# EAGLE board EasyBMS (EAGLE 9.6.2)
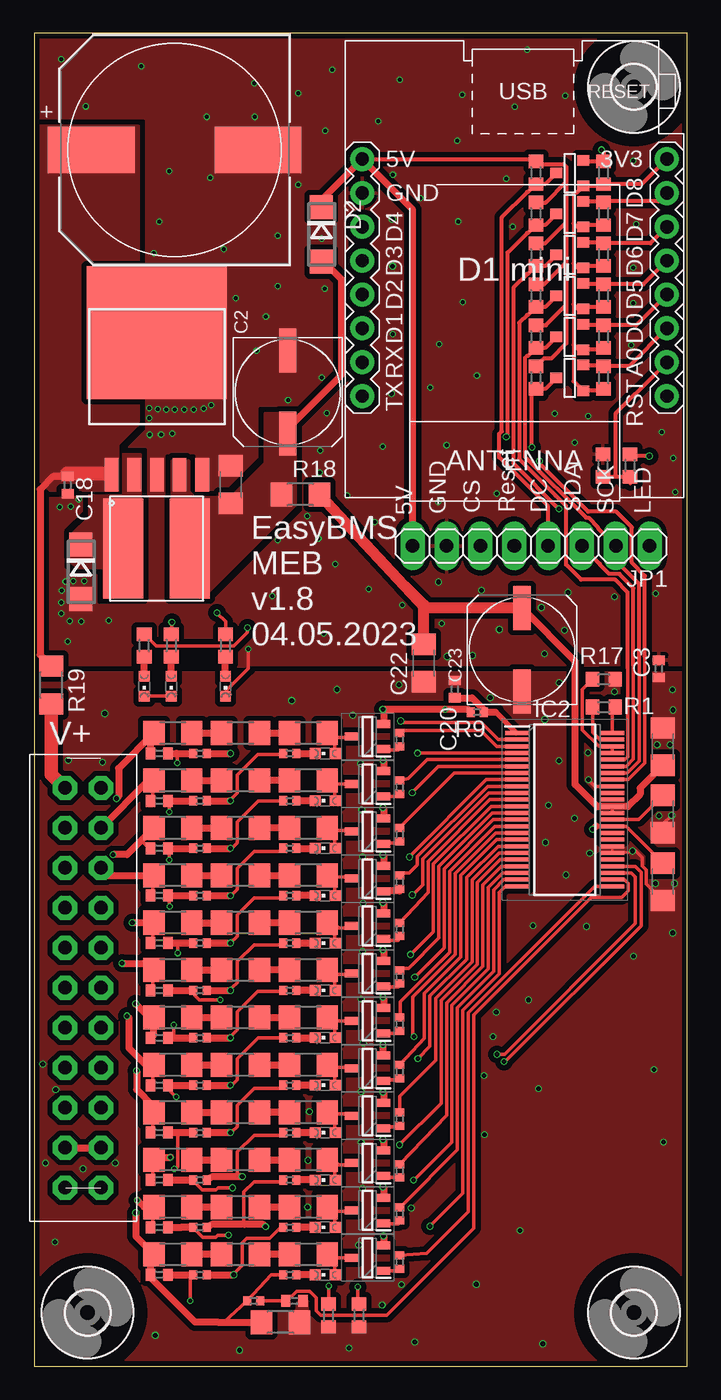
[diagram p0: board, top side]
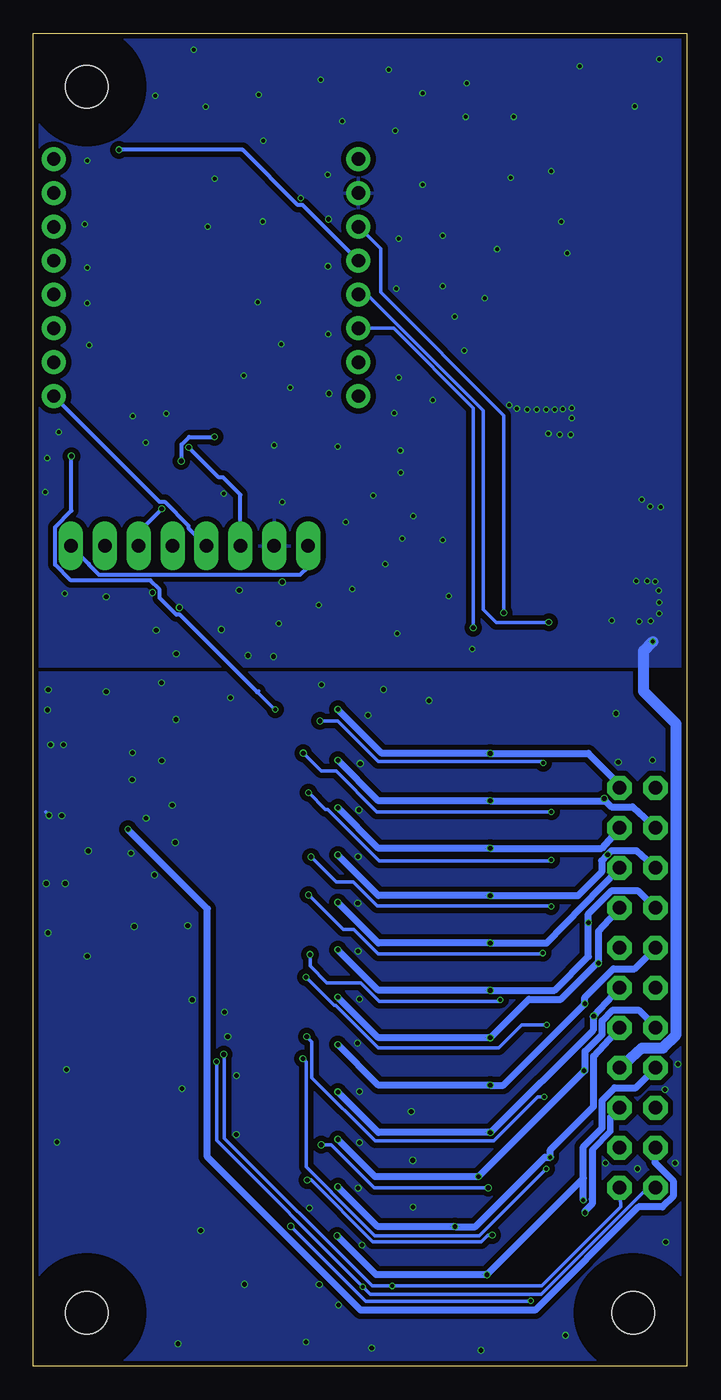
[diagram p1: board, bottom side, seen from below]

Size 49 x 100 mm. Coordinates in mm from the lower left corner, seen from the top.
Outline: 0,100 0,0 49,0 49,100 0,100
Copper layers (1*16): Top 0.035mm / dielectric 1.6mm / Bottom 0.035mm
Design rules "jlcpcb-2layers *": minimum track width 5mil, minimum drill 0.3mm, track to track 5mil, track to pad 5mil, pad to pad 5mil, via to via 5mil, smd to smd 5mil, copper to edge 0.2mm, drill to drill 6mil, minimum pad ring 10mil, minimum via ring 3mil, stop-mask expansion 4mil, vias tented up to drill 20mil, thermal gap 10mil

## Footprints (pad centres in the part's own frame; a part is rotated, then mirrored left to right if it is on the bottom)
C1206 = smd 1.6 x 1.8: 1 -1.4,0; 2 1.4,0
UD-8X10_NICHICON = smd 3.3 x 1.3: + 3.125,0; - -3.125,0
C0402 = smd 0.7 x 0.9: 1 -0.65,0; 2 0.65,0
WCAP-ASLI_16X17(DXL) = smd 6.5 x 3.5: 1 6.25,0; 2 -6.25,0
DO214AC = smd 1.8 x 1.7: A 2.05,0; C -2.05,0
3,2 = hole 3.2: 0,0
KTT0005B = smd 2.5 x 1.02: 1 6.111,-3.4; 2 6.111,-1.7; 3 6.111,0; 4 6.111,1.7; 5 6.111,3.4 | smd 10 x 10.5: 6 -4.564,0
SOP50P780X200-48N = smd 1.8 x 0.3: 1 -3.55,5.75; 2 -3.55,5.25; 3 -3.55,4.75; 4 -3.55,4.25; 5 -3.55,3.75; 6 -3.55,3.25; 7 -3.55,2.75; 8 -3.55,2.25; 9 -3.55,1.75; 10 -3.55,1.25; 11 -3.55,0.75; 12 -3.55,0.25; 13 -3.55,-0.25; 14 -3.55,-0.75; 15 -3.55,-1.25; 16 -3.55,-1.75; 17 -3.55,-2.25; 18 -3.55,-2.75; 19 -3.55,-3.25; 20 -3.55,-3.75; 21 -3.55,-4.25; 22 -3.55,-4.75; 23 -3.55,-5.25; 24 -3.55,-5.75; 25 3.55,-5.75; 26 3.55,-5.25; 27 3.55,-4.75; 28 3.55,-4.25; 29 3.55,-3.75; 30 3.55,-3.25; 31 3.55,-2.75; 32 3.55,-2.25; 33 3.55,-1.75; 34 3.55,-1.25; 35 3.55,-0.75; 36 3.55,-0.25; 37 3.55,0.25; 38 3.55,0.75; 39 3.55,1.25; 40 3.55,1.75; 41 3.55,2.25; 42 3.55,2.75; 43 3.55,3.25; 44 3.55,3.75; 45 3.55,4.25; 46 3.55,4.75; 47 3.55,5.25; 48 3.55,5.75
1X08 = drill 1.016 long: 1 -8.89,0; 2 -6.35,0; 3 -3.81,0; 4 -1.27,0; 5 1.27,0; 6 3.81,0; 7 6.35,0; 8 8.89,0
2X11_MEB12S = drill 1.016 octagon: 1_TOTAL+ 15,-1.35; 2_TOTAL+2 15,1.35; 3_C10+ 12,-1.35; 4_C11+ 12,1.35; 5_C8+ 9,-1.35; 6_C9+ 9,1.35; 7_C6+ 6,-1.35; 8_C7+ 6,1.35; 9 3,-1.35; 10_C5+ 3,1.35; 11_C4+ 0,-1.35; 12 0,1.35; 13_C2+ -3,-1.35; 14_C3+ -3,1.35; 15_TOTAL- -6,-1.35; 16_C1+ -6,1.35; 17_TOTAL- -9,-1.35; 18 -9,1.35; 19_THERMO1_IN -12,-1.35; 20_THERMO2_IN -12,1.35; 21_THERMO1_OUT -15,-1.35; 22_THERMO2_OUT -15,1.35
CY75-100UH = smd 3 x 7.5: P$1 -2.5,0; P$2 2.5,0
CHIPLED_0603 = smd 0.8 x 0.8: A 0,-0.75; C 0,0.75
SOT96P237X111-3N = smd 1 x 0.6: 1 -1.2,0.955; 2 -1.2,-0.955; 3 1.2,0
R0603 = smd 1 x 1.1: 1 -0.85,0; 2 0.85,0
R0402 = smd 0.6 x 0.7: 1 -0.5,0; 2 0.5,0
R1206 = smd 1.6 x 1.803: 1 -1.422,0; 2 1.422,0
SOT-23 = smd 0.787 x 0.889: 1 0.025,-1.016; 2 -0.94,1.016; 3 0.991,1.016
WEMOS-D1-MINI = drill 1: JP1.1 -11.43,9.525; JP1.2 -11.43,6.985; JP1.3 -11.43,4.445; JP1.4 -11.43,1.905; JP1.5 -11.43,-0.635; JP1.6 -11.43,-3.175; JP1.7 -11.43,-5.715; JP1.8 -11.43,-8.255; JP2.1 11.43,9.525; JP2.2 11.43,6.985; JP2.3 11.43,4.445; JP2.4 11.43,1.905; JP2.5 11.43,-0.635; JP2.6 11.43,-3.175; JP2.7 11.43,-5.715; JP2.8 11.43,-8.255

## Placement (x,y rotation side)
C1  1uF  [C1206]  47.17,41.43 270 top
C2  C249880  [UD-8X10_NICHICON]  19.02,73.08 270 top
C3  100n  [C0402]  46.86,52.32 90 top
C4  1uF  [C1206]  47.17,36.35 270 top
C5  10nF  [C0402]  19.53,4.9 0 top
C6  10nF  [C0402]  9.4,6.86 180 top
C7  10nF  [C0402]  9.4,10.41 180 top
C8  10nF  [C0402]  9.4,17.53 180 top
C9  10nF  [C0402]  9.4,13.97 180 top
C10  10nF  [C0402]  9.4,21.08 180 top
C11  10nF  [C0402]  9.4,24.64 180 top
C12  10nF  [C0402]  9.4,28.19 180 top
C13  10nF  [C0402]  9.4,31.75 180 top
C14  10nF  [C0402]  9.4,35.31 180 top
C15  10nF  [C0402]  9.4,38.86 180 top
C16  10nF  [C0402]  9.4,42.42 180 top
C17  10nF  [C0402]  9.4,45.97 180 top
C18  100n  [C0402]  2.51,66.09 270 top
C19  1uF  [C1206]  47.17,46.48 90 top
C20  100n  [C0402]  31.57,50.8 270 top
C21  1uF  [C1206]  14.76,66.14 90 top
C22  1uF  [C1206]  29.24,52.76 270 top
C23  C249880  [UD-8X10_NICHICON]  36.6,53.75 90 top
C24  C249935  [WCAP-ASLI_16X17(DXL)]  10.54,91.26 180 top
D1  C16015  [DO214AC]  3.51,59.59 270 top
D2  C16015  [DO214AC]  21.54,84.91 270 top
H1  MOUNT-HOLE3.2  [3,2]  4.02,4.02 0 top
H2  MOUNT-HOLE3.2  [3,2]  44.98,4.02 0 top
H3  MOUNT-HOLE3.2  [3,2]  44.98,95.98 0 top
IC1  LM2596S-5.0_NOPB  [KTT0005B]  9.22,72.97 270 top
IC2  LTC6811IG-1#PBF  [SOP50P780X200-48N]  39.8,41.76 0 top
JP1  [1X08]  37.29,61.54 180 top
JP7  [2X11_MEB12S]  3.69,28.38 90 top
L1  C2929443  [CY75-100UH]  9.19,61.34 0 top
LED1  KT-0603R  [CHIPLED_0603]  8.26,51.02 180 top
LED2  KT-0603R  [CHIPLED_0603]  10.29,51.02 180 top
LED4  KT-0603R  [CHIPLED_0603]  14.36,51.02 180 top
LED5  KT-0603R  [CHIPLED_0603]  21.84,6.86 90 top
LED6  KT-0603R  [CHIPLED_0603]  21.84,10.41 90 top
LED7  KT-0603R  [CHIPLED_0603]  21.84,17.53 90 top
LED8  KT-0603R  [CHIPLED_0603]  21.84,13.97 90 top
LED9  KT-0603R  [CHIPLED_0603]  21.84,21.08 90 top
LED11  KT-0603R  [CHIPLED_0603]  21.84,24.64 90 top
LED12  KT-0603R  [CHIPLED_0603]  21.84,28.19 90 top
LED13  KT-0603R  [CHIPLED_0603]  21.84,31.75 90 top
LED14  KT-0603R  [CHIPLED_0603]  21.84,35.31 90 top
LED15  KT-0603R  [CHIPLED_0603]  21.84,38.86 90 top
LED16  KT-0603R  [CHIPLED_0603]  21.84,42.42 90 top
LED17  KT-0603R  [CHIPLED_0603]  21.84,45.97 90 top
Q2  BSS84LT1G  [SOT96P237X111-3N]  25.02,8.13 180 top
Q3  BSS84LT1G  [SOT96P237X111-3N]  25.02,11.68 180 top
Q4  BSS84LT1G  [SOT96P237X111-3N]  25.02,18.8 180 top
Q5  BSS84LT1G  [SOT96P237X111-3N]  25.02,15.24 180 top
Q6  BSS84LT1G  [SOT96P237X111-3N]  25.02,22.35 180 top
Q7  BSS84LT1G  [SOT96P237X111-3N]  25.02,25.91 180 top
Q8  BSS84LT1G  [SOT96P237X111-3N]  25.02,29.46 180 top
Q9  BSS84LT1G  [SOT96P237X111-3N]  25.02,33.02 180 top
Q10  BSS84LT1G  [SOT96P237X111-3N]  25.02,36.58 180 top
Q11  BSS84LT1G  [SOT96P237X111-3N]  25.02,40.13 180 top
Q12  BSS84LT1G  [SOT96P237X111-3N]  25.02,43.69 180 top
Q13  BSS84LT1G  [SOT96P237X111-3N]  25.02,47.24 180 top
R1  100R  [R0603]  42.75,49.45 0 top
R3  100R  [R0402]  16.48,4.9 180 top
R4  10R0  [R1206]  10.41,8.38 0 top
R7  10R0  [R1206]  15.49,8.38 0 top
R8  10R0  [R1206]  20.57,8.38 0 top
R9  100R  [R0402]  33.25,49.07 180 top
R10  3.3k  [R0402]  27.43,7.82 270 top
R11  470R  [R0402]  19.18,6.86 180 top
R12  100R  [R0402]  12.45,6.86 0 top
R13  C370100  [R1206]  18.49,3.3 0 top
R14  10R0  [R1206]  10.41,11.94 0 top
R15  470k  [R0603]  44.7,67.56 90 top
R16  27K  [R0603]  42.67,67.56 270 top
R17  20k  [R0603]  42.75,51.54 180 top
R18  C370100  [R1206]  19.99,65.41 0 top
R19  100R  [R1206]  1.3,51.1 270 top
R20  10R0  [R1206]  15.49,11.94 0 top
R21  10R0  [R1206]  20.57,11.94 0 top
R22  3.3k  [R0402]  27.43,11.43 270 top
R23  470R  [R0402]  19.18,10.41 180 top
R24  100R  [R0402]  12.45,10.41 0 top
R25  10R0  [R1206]  10.41,19.05 0 top
R26  10R0  [R1206]  15.49,19.05 0 top
R27  10R0  [R1206]  20.57,19.05 0 top
R28  3.3k  [R0402]  27.43,18.54 270 top
R29  470R  [R0402]  19.18,17.53 180 top
R30  100R  [R0402]  12.45,17.53 0 top
R31  10R0  [R1206]  10.41,15.49 0 top
R32  10R0  [R1206]  15.49,15.49 0 top
R33  10R0  [R1206]  20.57,15.49 0 top
R34  3.3k  [R0402]  27.43,14.66 270 top
R35  470R  [R0402]  19.18,13.97 180 top
R36  100R  [R0402]  12.45,13.97 0 top
R37  10R0  [R1206]  10.41,22.61 0 top
R38  10R0  [R1206]  15.49,22.61 0 top
R39  10R0  [R1206]  20.57,22.61 0 top
R40  3.3k  [R0402]  27.43,22.1 270 top
R41  470R  [R0402]  19.18,21.08 180 top
R42  100R  [R0402]  12.45,21.08 0 top
R43  10R0  [R1206]  10.41,26.16 0 top
R44  10R0  [R1206]  15.49,26.16 0 top
R45  10R0  [R1206]  20.57,26.16 0 top
R46  3.3k  [R0402]  27.43,25.65 270 top
R47  470R  [R0402]  19.18,24.64 180 top
R48  100R  [R0402]  12.45,24.64 0 top
R49  10R0  [R1206]  10.41,29.72 0 top
R50  10R0  [R1206]  15.49,29.72 0 top
R51  10R0  [R1206]  20.57,29.72 0 top
R52  3.3k  [R0402]  27.43,29.21 270 top
R53  200R0  [R0603]  8.26,54.07 90 top
R54  200R0  [R0603]  10.29,54.07 90 top
R55  10k  [R0603]  42.72,77.24 270 top
R56  200R0  [R0603]  14.36,54.07 90 top
R57  12k  [R0603]  22.1,3.81 90 top
R58  12k  [R0603]  24.38,3.81 90 top
R59  10k  [R0603]  37.64,77.24 90 top
R60  10k  [R0603]  42.72,80.31 270 top
R63  470R  [R0402]  19.18,28.19 180 top
R64  100R  [R0402]  12.45,28.19 0 top
R65  10R0  [R1206]  10.41,33.27 0 top
R66  10R0  [R1206]  15.49,33.27 0 top
R67  10R0  [R1206]  20.57,33.27 0 top
R68  3.3k  [R0402]  27.43,32.77 270 top
R69  470R  [R0402]  19.18,31.75 180 top
R70  100R  [R0402]  12.45,31.75 0 top
R71  10R0  [R1206]  10.41,36.83 0 top
R72  10R0  [R1206]  15.49,36.83 0 top
R73  10R0  [R1206]  20.57,36.83 0 top
R74  3.3k  [R0402]  27.43,36.32 270 top
R75  470R  [R0402]  19.18,35.31 180 top
R76  100R  [R0402]  12.45,35.31 0 top
R77  10R0  [R1206]  10.41,40.39 0 top
R78  10R0  [R1206]  15.49,40.39 0 top
R79  10R0  [R1206]  20.57,40.39 0 top
R80  3.3k  [R0402]  27.43,39.88 270 top
R81  470R  [R0402]  19.18,38.86 180 top
R82  10k  [R0603]  37.64,80.31 90 top
R83  100R  [R0402]  12.45,38.86 0 top
R84  10R0  [R1206]  10.41,43.94 0 top
R85  10R0  [R1206]  15.49,43.94 0 top
R86  10R0  [R1206]  20.57,43.94 0 top
R87  3.3k  [R0402]  27.43,43.43 270 top
R88  470R  [R0402]  19.18,42.42 180 top
R89  100R  [R0402]  12.45,42.42 0 top
R90  10R0  [R1206]  10.41,47.5 0 top
R91  10R0  [R1206]  15.49,47.5 0 top
R92  10R0  [R1206]  20.57,47.5 0 top
R93  3.3k  [R0402]  27.43,46.99 270 top
R94  470R  [R0402]  19.18,45.97 180 top
R95  100R  [R0402]  12.45,45.97 0 top
R96  10k  [R0603]  42.72,83.39 270 top
R97  10k  [R0603]  37.64,83.39 90 top
R98  10k  [R0603]  42.72,86.46 270 top
R99  10k  [R0603]  37.64,86.46 90 top
R100  10k  [R0603]  42.72,89.53 270 top
R101  10k  [R0603]  37.64,89.53 90 top
R102  10k  [R0603]  42.72,74.17 270 top
R103  10k  [R0603]  37.64,74.17 90 top
T1  C8545  [SOT-23]  40.18,77.24 270 top
T2  C8545  [SOT-23]  40.18,80.31 270 top
T3  C8545  [SOT-23]  40.18,83.39 270 top
T4  C8545  [SOT-23]  40.18,86.46 270 top
T5  C8545  [SOT-23]  40.18,89.53 270 top
T6  C8545  [SOT-23]  40.18,74.17 270 top
U$2  WEMOS-D1-MINI  [WEMOS-D1-MINI]  36.04,82.31 180 top

## Library data of the parts
C1 C3-C22 = rcl
C2 C23 = rcl; SPICEPREFIX: C
C24 L1 = SamacSys_Parts
D1 D2 = diode
H1-H3 = holes
IC1 = SamacSys_Parts; DESCRIPTION: Switching Voltage Regulators 150 KHZ 3A STEP-DOWN VLTG REG; HEIGHT: mm; MANUFACTURER_NAME: Texas Instruments; MANUFACTURER_PART_NUMBER: LM2596S-5.0/NOPB; MOUSER_PART_NUMBER: 926-LM2596S-5.0/NOPB; MOUSER_PRICE-STOCK: https://www.mouser.co.uk/ProductDetail/Texas-Instruments/LM2596S-5.0-NOPB?qs=X1J7HmVL2ZHVjCOmW%252BYINA%3D%3D
IC2 = SamacSys_Parts; DESCRIPTION: Battery Monitoring 5.7V Automotive 48-Pin SSOP Tube; HEIGHT: 2mm; MANUFACTURER_NAME: Analog Devices; MANUFACTURER_PART_NUMBER: LTC6811IG-1#PBF; MOUSER_PART_NUMBER: 584-LTC6811IG-1#PBF; MOUSER_PRICE-STOCK: https://www.mouser.co.uk/ProductDetail/Analog-Devices/LTC6811IG-1PBF?qs=oahfZPh6IAL9qJ0YPEk6qg%3D%3D
JP1 = pinhead
JP7 = pinhead_own
LED1 LED2 LED4-LED9 LED11-LED17 = led
Q2-Q13 = SamacSys_Parts; DESCRIPTION: MOSFET 50V 130mA P-Channel; HEIGHT: 1.11mm; MANUFACTURER_NAME: ON Semiconductor; MANUFACTURER_PART_NUMBER: BSS84LT1G; MOUSER_PART_NUMBER: 863-BSS84LT1G; MOUSER_PRICE-STOCK: https://www.mouser.co.uk/ProductDetail/ON-Semiconductor/BSS84LT1G?qs=vNc2DXHODiKIGu9QIvMAfw%3D%3D
R1 R3 R4 R7-R60 R63-R103 = rcl; SPICEPREFIX: R
T1-T6 = zetex; OC_FARNELL: unknown; OC_NEWARK: unknown
U$2 = diy-modules

## Nets
5VINESP: D2.C JP1.1 JP1.8 R59.2 R82.2 R97.2 R99.2 R101.2 R103.2 U$2.JP2.8
+3V3: R55.2 R60.2 R96.2 R98.2 R100.2 R102.2 T1.3 T2.3 T3.3 T4.3 T5.3 T6.3 U$2.JP1.8
+5V: C19.1 C22.1 C23.+ IC2.36 IC2.37 R18.2
+5V/1: C2.+ C21.1 D2.A IC1.4 L1.P$2 R18.1
A0DC: JP1.4 R101.1 T5.1
A0IN: R15.1 R16.2 U$2.JP1.2
C0: C5.1 IC2.26 R3.1
C1: C6.1 IC2.24 R12.1
C1+: C7.2 JP7.16_C1+ Q2.2 R12.2 R14.1 R23.2
C1-: C6.2 JP7.17_TOTAL- R3.2 R4.1 R11.2 R13.1
C2: C7.1 IC2.22 R24.1
C2+: C9.2 JP7.13_C2+ Q3.2 R24.2 R31.1 R35.2
C3: C9.1 IC2.20 R36.1
C3+: C8.2 JP7.14_C3+ Q5.2 R25.1 R29.2 R36.2
C4: C8.1 IC2.18 R30.1
C4+: C10.2 JP7.11_C4+ Q4.2 R30.2 R37.1 R41.2
C5: C10.1 IC2.16 R42.1
C5+: C11.2 JP7.10_C5+ Q6.2 R42.2 R43.1 R47.2
C6: C11.1 IC2.14 R48.1
C6+: C12.2 JP7.7_C6+ Q7.2 R48.2 R49.1 R63.2
C7: C12.1 IC2.12 R64.1
C7+: C13.2 JP7.8_C7+ Q8.2 R64.2 R65.1 R69.2
C8: C13.1 IC2.10 R70.1
C8+: C14.2 JP7.5_C8+ Q9.2 R70.2 R71.1 R75.2
C9: C14.1 IC2.8 R76.1
C9+: C15.2 JP7.6_C9+ Q10.2 R76.2 R77.1 R81.2
C10: C15.1 IC2.6 R83.1
C10+: C16.2 JP7.3_C10+ Q11.2 R83.2 R84.1 R88.2
C11: C16.1 IC2.4 R89.1
C11+: C17.2 JP7.4_C11+ Q12.2 R89.2 R90.1 R94.2
C12: C17.1 IC2.2 R95.1
C12+: JP7.1_TOTAL+ Q13.2 R9.2 R15.2 R95.2
C12+POWER: JP7.2_TOTAL+2 R19.2
CSB: IC2.41 R99.1 T4.1
CSDSPL: JP1.6 R103.1 T6.1
CSDSPLESP: R102.1 T6.2 U$2.JP1.3
CSLTCESP: R98.1 T4.2 U$2.JP1.7
D3: R100.1 T5.2 U$2.JP2.5
GND: C2.- C3.2 C18.2 C21.2 C24.2 D1.A IC1.3 IC1.5 IC1.6 JP1.7 JP7.15_TOTAL- LED4.C R16.1 U$2.JP2.7
GND2: C1.2 C3.1 C4.2 C5.2 C19.2 C20.1 C22.2 C23.- IC2.30 IC2.31 IC2.40 R13.2 R17.1 R57.1 R58.1
GPIO4: IC2.32
GPIO5: IC2.33
IBIAS: IC2.45 IC2.46 R17.2
IMB: IC2.47 R1.1
IPB: IC2.48 R1.2
ISIGNAL: IC2.29
MISO: IC2.44 R82.1 T2.1
MISOESP: R60.1 T2.2 U$2.JP1.5
MOSI: IC2.43 JP1.3 R97.1 T3.1
MOSIESP: R96.1 T3.2 U$2.JP1.6
N$1: LED1.A R53.1
N$2: LED2.A R54.1
N$3: LED1.C LED2.C
N$4: LED4.A R56.1
N$8: R4.2 R7.1
N$9: R7.2 R8.1
N$10: LED5.A Q2.3 R8.2
N$11: Q2.1 R10.2
N$12: LED5.C R11.1
N$13: R14.2 R20.1
N$14: R20.2 R21.1
N$16: LED6.A Q3.3 R21.2
N$17: D1.C IC1.2 L1.P$1
N$19: Q3.1 R22.2
N$20: LED6.C R23.1
N$21: R25.2 R26.1
N$22: R26.2 R27.1
N$23: LED7.A Q4.3 R27.2
N$24: Q4.1 R28.2
N$26: LED7.C R29.1
N$27: R31.2 R32.1
N$28: R32.2 R33.1
N$29: LED8.A Q5.3 R33.2
N$30: R56.2 U$2.JP2.6
N$31: Q5.1 R34.2
N$32: LED8.C R35.1
N$33: R37.2 R38.1
N$34: R38.2 R39.1
N$35: LED9.A Q6.3 R39.2
N$36: Q6.1 R40.2
N$37: LED9.C R41.1
N$38: R43.2 R44.1
N$39: R44.2 R45.1
N$40: LED11.A Q7.3 R45.2
N$41: Q7.1 R46.2
N$42: LED11.C R47.1
N$43: R49.2 R50.1
N$44: R50.2 R51.1
N$45: LED12.A Q8.3 R51.2
N$46: Q8.1 R52.2
N$47: LED12.C R63.1
N$48: R65.2 R66.1
N$49: R66.2 R67.1
N$50: LED13.A Q9.3 R67.2
N$51: Q9.1 R68.2
N$52: LED13.C R69.1
N$53: R71.2 R72.1
N$54: R72.2 R73.1
N$55: LED14.A Q10.3 R73.2
N$56: Q10.1 R74.2
N$57: LED14.C R75.1
N$58: R77.2 R78.1
N$59: R78.2 R79.1
N$60: LED15.A Q11.3 R79.2
N$61: Q11.1 R80.2
N$62: LED15.C R81.1
N$63: R84.2 R85.1
N$64: R85.2 R86.1
N$65: LED16.A Q12.3 R86.2
N$66: Q12.1 R87.2
N$67: LED16.C R88.1
N$68: R90.2 R91.1
N$69: R91.2 R92.1
N$70: R53.2 U$2.JP2.3
N$71: LED17.A Q13.3 R92.2
N$72: Q13.1 R93.2
N$74: LED17.C R94.1
N$75: C18.1 C24.1 IC1.1 R19.1
N$124: R54.2 U$2.JP2.4
RESET: JP1.5 U$2.JP1.1
S1: IC2.25 R10.1
S2: IC2.23 R22.1
S3: IC2.21 R34.1
S4: IC2.19 R28.1
S5: IC2.17 R40.1
S6: IC2.15 R46.1
S7: IC2.13 R52.1
S8: IC2.11 R68.1
S9: IC2.9 R74.1
S10: IC2.7 R80.1
S11: IC2.5 R87.1
S12: IC2.3 R93.1
SCK: IC2.42 JP1.2 R59.1 T1.1
SCKESP: R55.1 T1.2 U$2.JP1.4
V+: C20.2 IC2.1 R9.1
VREF1: C1.1 IC2.35
VREF2: C4.1 IC2.34 JP7.19_THERMO1_IN JP7.20_THERMO2_IN
VTEMP1: IC2.27 JP7.21_THERMO1_OUT R57.2
VTEMP2: IC2.28 JP7.22_THERMO2_OUT R58.2

## Tracks (layer width: path | path; a pad name or v marks a point on that pad's centre or on a via)
5VINESP
  Top 0.305: U$2.JP2.8 37.47,90.56 R101.2 37.84,90.18 39.73,90.18 39.93,89.98 39.93,88.88 | R103.2 38.24,75.61 38.8,75.61 39.93,76.75 39.93,79.63 | 39.93,88.88 39.93,85.83 | 39.93,85.83 39.93,82.83 | 39.93,82.83 39.93,79.63 | R59.2 38.39,78.09 39.93,79.63 | R82.2 38.26,81.17 39.93,82.83 | R97.2 38.34,84.24 39.93,85.83 | R99.2 38.37,87.31 39.93,88.88
  Top 0.508: D2.C 21.54,87.49 U$2.JP2.8 28.4,86.78 JP1.8
  Bottom 0.305: JP1.1 44.83,60.2 44.83,60.13 44.08,59.38 28.98,59.38 28.4,59.97 JP1.8
+3V3
  Top 0.305: R55.2 42.58,76.25 T1.3 40.86,76.25 40.48,76.63 | R102.2 42.58,73.18 T6.3 40.48,73.9 40.48,76.63 | R98.2 41.34,85.61 T4.3 40.75,85.47 40.48,85.75 | R96.2 41.34,82.54 T3.3 40.8,82.4 40.48,82.73 | R60.2 41.34,79.47 T2.3 40.8,79.32 40.48,79.65 | 40.48,85.75 40.48,87.91 40.64,88.08 40.73,88.08 T5.3 42.58,88.54 R100.2 45.59,88.69 U$2.JP1.8 | 40.48,85.75 40.48,82.73 | 40.48,82.73 40.48,79.65 | 40.48,79.65 40.48,76.63
+5V
  Top 0.279: IC2.36 43.35,41.98 IC2.37
  Top 0.508: C19.1 45.47,43.38 45.47,42.9 44.54,41.98 43.35,41.98 42.25,41.98 40.59,43.64 40.59,52.88 C23.+
  Top 0.813: C23.+ 29.36,56.87 27.82,58.52 | 27.82,58.52 R18.2 | C22.1 29.23,57.11 27.82,58.52
+5V/1
  Top 0.508: C2.+ 19.02,70.36 23.06,74.4 23.06,81.53 21.73,82.86 D2.A
  pour Top (isolate 0.2, no thermals): 10.36,67.89 10.36,57.89 12.88,57.89 19.58,64.59 19.58,71.45 17.35,71.45 17.35,67.74 14.76,65.15 12.06,65.15 11.61,65.61 11.61,67.89
A0DC
  Top 0.305: T5.1 38.34,88.69 R101.1 37.05,88.09 36.98,88.09 35.09,86.2 35.09,70.14 34.89,69.94 34.89,68.19 38.56,64.53 JP1.4
A0IN
  Top 0.279: 46.65,74.5 U$2.JP1.2 | 44.65,66.77 R15.1 44.7,66.22
  Top 0.305: 45.07,66.71 R15.1 43.64,66.71 | 43.64,66.71 R16.2 | 43.64,66.71 43.64,71.49 46.65,74.5
C0
  Top 0.279: R3.1 C5.1 18.99,4.9 19.71,5.62 20.67,5.62 21.16,5.13 21.16,4.17 21.51,3.81 26.44,3.81 32.97,10.34 32.97,26.34 41.78,35.15 44.07,35.15 44.55,35.64 44.55,36.22 44.52,36.25 44.52,36.27 44.28,36.51 IC2.26
C1  (via drill 0.3, 0.35)
  Top 0.279: v11.71,4.89 11.71,6.86 | v29.69,10.49 32.16,12.95 32.16,26.7 34.88,29.43 34.88,35.54 35.38,36.04 36.14,36.04 36.18,36.01 IC2.24
  Top 0.508: C6.1 11.71,6.86 R12.1
  Bottom 0.279: v11.71,4.89 11.73,4.86 24.07,4.86 v29.69,10.49
C1+  (via drill 0.3, 0.35)
  Top 0.279: C7.2 8.89,10.67 8.89,11.94 R14.1 | R23.2 18.41,10.35 17.67,9.6 15.96,9.6 15.62,9.26 15.62,7.56 14.99,6.92 v14.99,6.86
  Top 0.508: R12.2 v14.99,6.86 | v26.21,9.78 v26.22,9.77 Q2.2 | R14.1 8.26,11.94 v7.75,12.45
  Bottom 0.508: v26.21,9.78 23.29,6.86 v14.99,6.86 14.99,6.87 7.75,14.11 | JP7.16_C1+ 3.82,20.89 5.4,20.89 6.35,19.94 6.35,17.87 7.75,16.48 7.75,14.11 | v7.75,12.45 7.75,14.11
C1-  (via drill 0.35)
  Top 0.279: R11.2 17.79,6.86 R3.2 14.23,3.3 13.79,3.3
  Top 0.508: R13.1 13.79,3.3 12.09,3.3 8.75,6.64 C6.2 8.75,8.14 R4.1 7.64,9.74 v7.64,11.51
  Bottom 0.5: 7.06,16.2 7.06,16.27 5.72,17.61 5.72,18.7 JP7.17_TOTAL-
  Bottom 0.508: 7.06,16.2 7.06,12.55 7.09,12.52 7.09,12.17 7.64,11.62 v7.64,11.51
C2  (via drill 0.35)
  Top 0.279: 11.02,10.41 11.9,10.41 12.65,9.67 13.62,9.67 13.78,9.83 v14.58,9.83 | v28.46,13.97 28.52,13.97 31.34,16.8 31.34,27.07 34.07,29.79 34.07,35.92 35.15,37.01 IC2.22
  Top 0.508: C7.1 11.02,10.41 R24.1
  Bottom 0.279: v14.58,9.83 14.92,9.83 15.4,9.35 23.54,9.35 28.16,13.97 v28.46,13.97
C2+  (via drill 0.3, 0.35)
  Top 0.279: C9.2 8.89,14.16 8.89,15.43 R31.1 | R35.2 18.41,13.84 16.51,13.84 15.75,13.08 15.75,10.69 15.8,10.64
  Top 0.508: v17.37,10.46 17.2,10.64 15.8,10.64 13.32,10.64 R24.2 | v26.16,13.46 26.22,13.4 Q3.2 | R31.1 9.18,15.68 v10.22,15.68
  Bottom 0.508: v26.16,13.46 23.16,10.46 v17.37,10.46 15.85,10.46 10.63,15.68 v10.22,15.68 10.22,16.24 6.99,19.48 6.99,23.26 JP7.13_C2+
C3  (via drill 0.35)
  Top 0.279: C9.1 11.88,13.97 12.62,13.23 13.65,13.23 13.8,13.39 v14.88,13.39 | v27.41,16.61 30.53,19.74 30.53,27.43 33.26,30.16 33.26,36.3 34.97,38.01 IC2.20
  Top 0.508: C9.1 R36.1
  Bottom 0.279: v14.88,13.39 23.44,13.39 26.67,16.61 v27.41,16.61
C3+  (via drill 0.35)
  Top 0.279: C8.2 8.89,17.65 8.89,18.92 R25.1 | R29.2 18.41,17.34 16.51,17.34 15.24,16.07 15.24,14.51 v15.62,14.22
  Top 0.508: v15.62,14.22 15.6,14.2 13.32,14.2 R36.2 | v26.16,17.02 26.22,16.96 Q5.2 | R25.1 8.99,19.46 7.69,20.76 v7.69,22.17
  Bottom 0.508: v26.16,17.02 23.37,14.22 v15.62,14.22 7.69,22.16 v7.69,22.17 7.62,22.17 7.62,23.62 6.35,24.89 6.35,25.91 5.54,26.72 3.61,26.72 2.4,25.51 JP7.14_C3+
C4  (via drill 0.3, 0.35)
  Top 0.279: 10.67,17.53 10.77,17.43 10.77,14.96 10.62,14.81 v10.53,14.81 | v28.79,23.07 29.69,23.98 29.69,27.78 32.45,30.54 32.45,36.65 34.8,39.01 IC2.18
  Top 0.508: C8.1 10.67,17.53 R30.1
  Bottom 0.279: v10.53,14.81 15.54,9.79 23.4,9.79 26.64,13.04 26.64,13.07 28.55,14.97 28.55,22.84 v28.79,23.07
C4+  (via drill 0.35)
  Top 0.279: C10.2 8.89,21.14 8.89,22.42 R37.1 | R41.2 18.41,20.83 16.51,20.83 15.24,19.56 15.24,17.97 14.92,17.65 v14.73,17.53
  Top 0.508: v6.97,26.27 7.11,26.13 7.11,23.88 8.38,22.61 R37.1 | R30.2 v14.73,17.53 | v26.16,20.57 26.22,20.52 Q4.2
  Bottom 0.508: v26.16,20.57 23.11,17.53 v14.73,17.53 14.7,17.53 7.02,25.21 7.02,26.22 v6.97,26.27 JP7.11_C4+
C5  (via drill 0.3, 0.35)
  Top 0.279: v10.67,20.19 10.29,20.54 C10.1 | v28.5,24.71 28.4,24.81 28.4,27.7 31.58,30.88 31.58,36.96 34.63,40.01 IC2.16
  Top 0.508: C10.1 R42.1
  Bottom 0.279: v10.67,20.19 11.18,20.19 14.48,16.89 23.37,16.89 28.12,21.64 28.12,24.33 v28.5,24.71
C5+  (via drill 0.35)
  Top 0.279: R47.2 16.83,24.64 15.24,23.05 15.24,21.46 14.92,21.14 v14.73,21.08
  Top 0.508: C11.2 8.99,24.88 R43.1 8.64,26.16 7.62,27.18 v7.63,27.19 | R42.2 v14.73,21.08 | v26.16,24.13 26.16,23.36 Q6.2
  Bottom 0.508: v26.16,24.13 23.11,21.08 v14.73,21.08 13.74,21.08 v7.63,27.19 7.63,27.67 5.5,29.81 3.9,29.81 JP7.10_C5+
C6  (via drill 0.3, 0.35)
  Top 0.279: v10.48,25.59 10.48,24.64 | v28.55,29.18 28.57,29.18 30.77,31.39 30.77,37.31 34.46,41.01 IC2.14
  Top 0.508: C11.1 10.48,24.64 R48.1
  Bottom 0.279: v10.48,25.59 12.38,25.59 14.1,23.88 23.11,23.88 26.3,27.07 26.42,27.07 28.54,29.18 v28.55,29.18
C6+  (via drill 0.35)
  Top 0.279: C12.2 8.89,28.45 8.89,29.72 R49.1 | 14.66,24.64 15.24,25.22 15.24,26.59 16.78,28.13 18.41,28.13 R63.2
  Top 0.508: R48.2 14.66,24.64 v14.73,24.64 | v26.16,27.69 26.22,27.63 Q7.2 | v6.6,30.23 8.48,30.23 R49.1
  Bottom 0.508: v26.16,27.69 23.11,24.64 v14.73,24.64 11.84,27.53 9.43,27.53 6.74,30.23 v6.6,30.23 6.6,32.64 JP7.7_C6+
C7  (via drill 0.3, 0.35)
  Top 0.279: v13.97,27.5 13.95,27.47 12.41,27.47 12.06,27.81 12.06,28.13 R64.1 | v28.25,30.89 29.96,32.6 29.96,37.68 34.28,42.01 IC2.12
  Top 0.508: C12.1 R64.1
  Bottom 0.279: v13.97,27.5 14.1,27.37 23.07,27.37 24.46,28.77 26.99,28.77 28.25,30.02 v28.25,30.89
C7+  (via drill 0.35)
  Top 0.279: C13.2 8.89,31.94 8.89,33.21 R65.1 | R69.2 18.41,31.62 16.51,31.62 15.24,30.35 15.24,28.77 14.92,28.45 v14.73,28.19
  Top 0.508: R64.2 v14.73,28.19 | v26.16,31.24 26.22,31.18 Q8.2 | R65.1 v7.37,33.27
  Bottom 0.508: v26.16,31.24 23.11,28.19 v14.73,28.19 9.91,28.19 7.37,30.73 v7.37,33.27 7.37,33.93 5.61,35.69 3.68,35.69 2.4,34.4 JP7.8_C7+
C8  (via drill 0.3, 0.35)
  Top 0.279: v10.79,30.99 10.79,31.75 | v28.36,35.36 28.39,35.36 29.14,36.11 29.14,38.05 34.1,43.01 IC2.10
  Top 0.508: C13.1 10.79,31.75 R70.1
  Bottom 0.279: v10.79,30.99 10.86,30.92 23.11,30.92 24.96,32.77 25.77,32.77 v28.36,35.36
C8+  (via drill 0.35)
  Top 0.279: C14.2 8.89,35.43 8.89,36.7 R71.1 | v14.73,31.75 15.24,32.26 15.24,33.85 16.51,35.12 18.41,35.12 R75.2
  Top 0.508: JP7.5_C8+ 5.41,36.83 R71.1 | R70.2 v14.73,31.75 | v26.16,34.8 26.22,34.74 Q9.2
  Bottom 0.508: v26.16,34.8 23.11,31.75 v14.73,31.75 10.49,31.75 JP7.5_C8+
C9  (via drill 0.3, 0.35)
  Top 0.279: v10.17,34.49 v10.16,34.49 10.16,35.12 C14.1 | v28.17,38.2 28.17,38.25 33.92,44.01 IC2.8
  Top 0.508: C14.1 R76.1
  Bottom 0.279: v10.17,34.49 10.2,34.52 23.22,34.52 25.02,36.32 26.29,36.32 v28.17,38.2
C9+  (via drill 0.35)
  Top 0.279: 8.05,39.45 8.57,38.92 C15.2 | R81.2 18.41,38.61 16.51,38.61 15.24,37.34 15.24,35.75 14.92,35.43 v14.73,35.31
  Top 0.508: R77.1 8.05,39.45 6.99,38.38 v5.93,38.38 v5.92,38.38 | R76.2 v14.73,35.31 | v26.16,38.35 26.22,38.3 Q10.2
  Bottom 0.508: v26.16,38.35 23.11,35.31 v14.73,35.31 8.14,35.31 6.38,37.06 6.38,37.92 v5.92,38.38 5.63,38.68 3.77,38.68 JP7.6_C9+
C10  (via drill 0.3, 0.35)
  Top 0.279: v10.16,37.97 10.16,38.61 C15.1 | v28.36,43.03 28.36,43.04 30.33,45.01 IC2.6
  Top 0.508: C15.1 R83.1
  Bottom 0.279: v10.16,37.97 10.22,37.91 23.05,37.91 26.92,41.78 27.12,41.78 v28.36,43.03
C10+  (via drill 0.35)
  Top 0.279: C16.2 8.89,42.42 8.89,43.69 R84.1 | R88.2 16.83,42.42 15.24,40.83 15.24,39.24 14.92,38.92 v14.73,38.86
  Top 0.508: JP7.3_C10+ 8.57,43.94 R84.1 | R83.2 v14.73,38.86 | v26.16,41.91 26.22,41.85 Q11.2
  Bottom 0.508: v26.16,41.91 23.11,38.86 v14.73,38.86 6.38,38.86 JP7.3_C10+
C11  (via drill 0.3, 0.35)
  Top 0.279: 10.15,42.42 v10.15,41.59 | v28.75,46 v28.76,46.01 IC2.4
  Top 0.508: C16.1 10.15,42.42 R89.1
  Bottom 0.279: v10.15,41.59 23.24,41.59 26.29,44.64 27.39,44.64 v28.75,46
C11+  (via drill 0.35)
  Top 0.279: 14.66,42.42 15.24,43 15.24,44.37 16.78,45.91 18.41,45.91 R94.2
  Top 0.508: C17.2 8.75,47.25 R90.1 6.35,44.86 6.35,42.76 v6.18,42.59 | R89.2 14.66,42.42 v14.73,42.42 | v26.16,45.47 26.22,45.41 Q12.2
  Bottom 0.508: v26.16,45.47 23.11,42.42 v14.73,42.42 6.1,42.42 | 6.1,42.42 5.64,41.96 4.05,41.96 JP7.4_C11+ | v6.18,42.59 6.18,42.5 6.1,42.42
C12  (via drill 0.3, 0.35)
  Top 0.279: v10.75,45.24 10.75,45.89 10.67,45.97 | v27.51,48.41 27.64,48.28 33.53,48.28 34.81,47.01 IC2.2
  Top 0.508: C17.1 10.67,45.97 R95.1
  Bottom 0.279: v10.75,45.24 10.87,45.35 23.12,45.35 26.18,48.41 v27.51,48.41
C12+  (via drill 0.3, 0.35)
  Top 0.2: R9.2 32.75,49.15
  Top 0.305: v46.15,68.28 44.84,68.28 R15.2
  Top 0.406: R9.2 32.55,49.28 | v30.85,49.28 30.86,49.28
  Top 0.508: R95.2 v14.73,45.97 | Q13.2 26.22,49.22 v26.16,49.28 30.86,49.28 32.55,49.28
  Bottom 0.2: JP7.1_TOTAL+ 4.94,43.54
  Bottom 0.254: 32.11,50.67 32.21,50.57 30.91,49.28 v30.85,49.28
  Bottom 0.305: 32.21,50.57 38.03,56.39 38.27,56.39 39.52,57.65 39.52,58.26 40.22,58.95 46.19,58.95 47.37,60.13 47.37,62.95 46.15,64.17 v46.15,68.28
  Bottom 0.508: v26.16,49.28 22.86,45.97 v14.73,45.97 7.37,45.97 4.94,43.54
C12+POWER
  Top 1.016: JP7.2_TOTAL+2 1.29,44.41 R19.2
CSB  (via drill 0.35)
  Top 0.279: 45.82,53.21 45.82,45.25 44.58,44.01 IC2.41
  Top 0.305: T4.1 38.34,85.61 R99.1 37.05,85.02 36.98,85.02 35.52,83.56 35.52,69.82 v35.42,69.72 | 45.82,53.21 45.82,59.3 44.83,60.29 44.83,62.95 43.67,64.11 41.56,64.11 37.9,67.76 v37.9,67.9
  Bottom 0.305: v37.9,67.9 37.88,67.93 37.88,69.16 37.31,69.72 v35.42,69.72
CSDSPL  (via drill 0.35)
  Top 0.305: T6.1 38.34,73.32 R103.1 37.34,73.02 v37.34,68.94
  Bottom 0.305: v37.34,68.94 35.08,66.67 34.77,66.67 33.48,65.38 JP1.6
CSDSPLESP
  Top 0.305: U$2.JP1.3 44.63,75.02 R102.1 42.63,75.11 T6.2
CSLTCESP
  Top 0.305: T4.2 42.63,87.4 | 42.63,87.4 R98.1 | U$2.JP1.7 46.85,87.4 42.63,87.4
D3  (via drill 0.35)
  Top 0.305: T5.2 41.29,90.39 R100.1 42.72,91.11 v42.57,91.26
  Bottom 0.305: U$2.JP2.5 28.79,87.12 29.16,87.12 33.3,91.26 v42.57,91.26
GND  (via drill 0.3, 0.35)
  Top 0.254: v16.08,53.82 16.08,52.33 14.36,50.61 LED4.C
  Bottom 0.813: JP7.15_TOTAL- 3.35,23.88 1.78,23.88 0.79,24.87 0.79,48.18 3.23,50.62 3.23,53.67 v2.54,54.36
  other vias: 27.61,57.1 22.61,60.2 46.63,57.96 30.33,64.85 29.72,73.41 30.94,69.09 26.9,77.44 25.55,63.35 21.34,62.1 26.16,68.99 21.59,84.58 21.59,74.17 21.46,68.71 21.44,67.03 17.86,57.78 20.5,63.78 21.95,71.5 18.29,81.03 18.29,84.84 18.29,61.98 14.22,83.82 19.81,88.65 13.21,89.15 16.56,93.73 19.81,95.5 16.51,96.27 12.95,93.73 10.16,89.66 9.4,85.85 21.84,92.71 31.75,91.93 27.43,96.52 22.35,97.28 26.92,89.41 32.11,95.38 25.83,93.41 28.96,87.63 21.72,54.97 1.93,64.47 8.64,71.12 15.14,80.14 8.97,83.52 3.89,94.51 36.07,94.49 34.9,55.27 38.28,53.44 33.55,58.22 30.99,53.24 30.33,58.83 25.1,58.29 16.69,76.2 21.79,80.85 17.4,78.74 5.61,55.93 2.08,58.19 2.06,57.3 2.06,56.46 2.69,55.91 3.56,55.85 2.36,58.88 2.95,58.9 3.78,58.9 10.36,69.95 8.69,69.88 9.53,69.9 8.64,71.88 9.3,71.81 9.91,71.78 10.54,71.78 11.25,71.78 11.96,71.75 12.73,71.83 13.31,72.11 2.74,64.49 3.35,65.02 8.03,97.54 2.06,98.04 36.98,98.78 39.85,95.33 23.5,65.3 34.72,65.46 30.58,55.73 40.06,58.04 32.89,53.31 19.05,72.47 38.05,56.92 39.78,55.22 26.87,86.06 26.9,82.52 26.82,72.97 43.54,57.73 31.8,85.89 32.16,79.82 33.22,74.33 35.92,85.51 39.04,71.48 41.55,71.28 40.56,69.3 47.09,70.09 47.96,68.13 48.11,65.57 30.4,76.67 35.41,89.09 44.96,90.43 45.16,85.68 44.96,82.43 44.96,79.74 44.81,76.62
  pour Bottom (isolate 0.4): -0.25,52.45 49.25,52.45 49.25,100.15 -0.25,100.15
  pour Top (isolate 0.4, rank 3, no thermals): -0.25,100.33 23.55,100.33 23.55,52.45 -0.25,52.45
  pour Top (isolate 0.4, rank 3): 23.37,100.38 49.53,100.38 49.53,52.45 23.37,52.45
GND2  (via drill 0.35)
  Top 0.2: 44.98,38.56 43.4,38.56 IC2.30 IC2.31
  Top 0.254: IC2.40 42.06,43.51 v41.58,43.99 | C4.2 45.94,36.18 45.94,37.22 45.62,37.54 45.62,38.18 45.14,38.66 v44.88,38.66 | C1.2 47.17,40.66 v47.83,41.33
  Bottom 0.254: v47.83,41.33 48.08,41.58
  other vias: 37.85,20.83 33.17,6.15 36.45,10.19 28.55,1.8 23.62,1.37 15.42,1.19 38.15,1.68 1.57,9.32 3.68,14.81 41.43,32.99 39.37,45.42 19.33,49.94 5.31,48.97 43.54,50.6 41.68,38.48 38.35,39.29 0.86,15.24 9.09,2.31 6.1,15.24 20.52,11.94 20.55,15.44 20.65,19.1 37.41,33.05 37.08,27.48 40.54,41.12 39.4,51.28 34.21,50.14 27.38,51.13 22.73,50.77 26.11,4.6 27.56,6.12 24.36,9.09 24.64,13.36 24.54,16.76 24.54,20.6 24.69,24.23 24.54,27.53 24.64,31.14 24.66,34.75 24.64,38.23 24.59,41.73 24.49,45.21 23.9,48.84 2.57,45.47 5.13,45.31 0.66,22.66 1.63,20.75 39.9,36.86 28.3,11.86 41.55,46.02 34.67,26.57 34.42,24.71 33.78,17.37 33.76,21.79 47.88,50.75 47.93,49.23 47.22,16.81 46.51,22.25 44.96,30.76 46.74,46.63 48.03,36.22 47.9,32.51 47.7,46.63 46.86,41.3 46.61,36.22 38.3,48.51 38.58,42.09
  pour Top (isolate 0.4, no thermals): -0.51,52.07 49.2,52.07 49.2,50.32 49.28,50.24 49.28,-0.36 -0.51,-0.36
  pour Bottom (isolate 0.4, no thermals): -0.53,52.07 49.3,52.07 49.3,-0.38 -0.53,-0.38
IBIAS
  Top 0.279: IC2.45 IC2.46 42.34,46.52 41.12,47.73 41.12,50.76 R17.2
IMB
  Top 0.279: IC2.47 42.42,47.02 41.9,47.53 R1.1
IPB
  Top 0.279: IC2.48 43.36,49.21 R1.2
MISO
  Top 0.279: IC2.44 44.31,45.51 44.53,45.72 44.53,52.41
  Top 0.305: T2.1 38.34,79.47 R82.1 37.05,78.87 36.98,78.87 36.38,78.28 36.38,68.06 39.13,65.32 39.9,64.54 39.9,60.13 41.03,59 43.58,59 44.53,58.05 44.53,52.41
MISOESP
  Top 0.305: U$2.JP1.5 45.69,81.17 R60.1 41.29,81.17 T2.2
MOSI  (via drill 0.35)
  Top 0.279: IC2.43 44.4,45.01 44.96,45.56 44.96,52.57
  Top 0.305: T3.1 38.34,82.54 R97.1 37.05,81.94 36.98,81.94 35.95,80.92 35.95,67.75 v39.37,64.32 | 44.96,52.57 44.96,58.37 43.89,59.44 43.14,59.44 42.44,60.13 42.44,60.2 JP1.3
  Bottom 0.305: v39.37,64.32 41.1,62.6 JP1.3
MOSIESP
  Top 0.305: U$2.JP1.6 46.23,84.24 R96.1 42.63,84.33 T3.2
N$1
  Top 0.508: LED1.A R53.1
N$2
  Top 0.508: LED2.A R54.1
N$3
  Top 0.254: LED2.C LED1.C
N$4
  Top 0.508: LED4.A R56.1
N$8
  Top 0.508: R7.1 R4.2
N$9
  Top 0.508: R8.1 R7.2
N$10
  Top 0.279: 22.23,8.13 22.54,7.81 22.54,6.86 LED5.A | 22.23,8.13 Q2.3 | 22.23,8.13 R8.2
N$11
  Top 0.279: Q2.1 27.43,7.17 R10.2
N$12
  Top 0.508: LED5.C R11.1
N$13
  Top 0.508: R14.2 R20.1
N$14
  Top 0.508: R20.2 R21.1
N$16
  Top 0.279: 22.54,11.62 22.54,10.67 LED6.A | 22.54,11.62 22.23,11.94 R21.2 22.54,11.62 | 22.54,11.62 23.81,11.62 Q3.3
N$17
  pour Top (isolate 0.2, rank 2, no thermals): 6.05,68.38 7.98,68.38 7.98,57.71 5.28,57.71 5.28,59.89 3.23,59.92 2.8,60.34 2.8,62.34 4.17,63.7 4.17,66.5
N$19
  Top 0.279: R22.2 27.3,10.67 26.35,10.67 Q3.1
N$20
  Top 0.508: LED6.C R23.1
N$21
  Top 0.508: R25.2 R26.1
N$22
  Top 0.508: R27.1 R26.2
N$23
  Top 0.279: 22.23,18.92 22.54,18.61 22.54,17.65 LED7.A | 22.23,18.92 23.81,18.92 Q4.3 | 22.23,18.92 R27.2
N$24
  Top 0.279: R28.2 27.3,17.97 26.35,17.97 Q4.1
N$26
  Top 0.508: R29.1 LED7.C
N$27
  Top 0.508: R31.2 R32.1
N$28
  Top 0.508: R32.2 R33.1
N$29
  Top 0.279: LED8.A 22.54,14.16 22.54,15.11 22.23,15.43 R33.2 22.23,15.75 22.86,15.11 23.81,15.11 Q5.3
N$30  (via drill 0.35)
  Top 0.279: v13.72,56.52 14.38,55.86 14.38,54.94 R56.2
  Bottom 0.279: U$2.JP2.6 24.59,85.48 22.96,83.86 22.96,80.57 13.72,71.32 v13.72,56.52
N$31
  Top 0.279: R34.2 27.32,14.16 26.35,14.16 Q5.1
N$32
  Top 0.508: LED8.C R35.1
N$33
  Top 0.508: R37.2 R38.1
N$34
  Top 0.508: R38.2 R39.1
N$35
  Top 0.279: 22.23,22.42 22.54,22.1 22.54,21.14 LED9.A | 22.23,22.42 23.81,22.42 Q6.3 | 22.23,22.42 R39.2
N$36
  Top 0.279: R40.2 27.3,21.46 26.35,21.46 Q6.1
N$37
  Top 0.508: LED9.C R41.1
N$38
  Top 0.508: R43.2 R44.1
N$39
  Top 0.508: R44.2 R45.1
N$40
  Top 0.279: 22.23,25.91 22.54,25.59 22.54,24.64 LED11.A | 22.23,25.91 Q7.3 | 22.23,25.91 R45.2
N$41
  Top 0.279: R46.2 27.3,24.96 26.35,24.96 Q7.1
N$42
  Top 0.508: R47.1 LED11.C
N$43
  Top 0.508: R49.2 R50.1
N$44
  Top 0.508: R51.1 R50.2
N$45
  Top 0.279: 22.54,29.4 22.54,28.45 LED12.A | 22.54,29.4 22.23,29.72 R51.2 22.54,29.4 | 22.54,29.4 23.81,29.4 Q8.3
N$46
  Top 0.279: R52.2 27.3,28.45 26.35,28.45 Q8.1
N$47
  Top 0.508: LED12.C R63.1
N$48
  Top 0.508: R65.2 R66.1
N$49
  Top 0.508: R67.1 R66.2
N$50
  Top 0.279: LED13.A 22.54,31.94 22.54,32.89 22.23,33.21 R67.2 22.23,33.53 22.86,32.89 23.81,32.89 Q9.3
N$51
  Top 0.279: R68.2 27.3,31.94 26.35,31.94 Q9.1
N$52
  Top 0.508: R69.1 LED13.C
N$53
  Top 0.508: R71.2 R72.1
N$54
  Top 0.508: R72.2 R73.1
N$55
  Top 0.279: 22.23,36.7 22.54,36.39 22.54,35.43 LED14.A | 22.23,36.7 23.81,36.7 Q10.3 | 22.23,36.7 R73.2
N$56
  Top 0.508: R74.2 27.41,35.65 26.25,35.65 Q10.1
N$57
  Top 0.508: LED14.C R75.1
N$58
  Top 0.508: R77.2 R78.1
N$59
  Top 0.508: R79.1 R78.2
N$60
  Top 0.279: 22.23,40.2 22.54,39.88 22.54,38.92 LED15.A | 22.23,40.2 23.81,40.2 Q11.3 | 22.23,40.2 R79.2
N$61
  Top 0.279: R80.2 27.3,39.24 26.35,39.24 Q11.1
N$62
  Top 0.508: R81.1 LED15.C
N$63
  Top 0.508: R84.2 R85.1
N$64
  Top 0.508: R86.1 R85.2
N$65
  Top 0.279: 22.23,43.69 22.54,43.37 22.54,42.42 LED16.A | 22.23,43.69 Q12.3 | 22.23,43.69 R86.2
N$66
  Top 0.279: R87.2 27.3,42.74 26.35,42.74 Q12.1
N$67
  Top 0.508: LED16.C R88.1
N$68
  Top 0.508: R90.2 R91.1
N$69
  Top 0.508: R91.2 R92.1
N$70  (via drill 0.35)
  Top 0.279: v16,55.4 16,55.04 14.99,54.03 9.16,54.03 R53.2
  Bottom 0.279: U$2.JP2.3 21.98,77.86 16,71.88 v16,55.4
N$71
  Top 0.279: 22.54,47.18 22.54,46.23 LED17.A | 22.54,47.18 22.23,47.5 R92.2 22.54,47.18 | 22.54,47.18 23.81,47.18 Q13.3
N$72
  Top 0.279: R93.2 27.3,46.23 26.35,46.23 Q13.1
N$74
  Top 0.508: R94.1 LED17.C
N$75
  Top 0.305: C18.1 2.44,66.82 2.44,66.95
  Top 0.508: C18.1 1.41,66.74 0.46,65.79 0.46,53.37 R19.1
  Top 1.016: IC1.1 5.73,66.95 2.44,66.95
  pour Top (isolate 0.4, no thermals): 7.85,93.09 7.85,70.64 6.32,69.11 6.32,65.66 1.17,65.66 -0.15,66.98 -0.15,93.09
N$124  (via drill 0.35)
  Top 0.279: v10.34,55.8 10.34,54.96 R54.2
  Bottom 0.279: v10.34,55.8 14.28,55.8 15.24,56.77 15.24,71.69 23.95,80.4 U$2.JP2.4
RESET
  Bottom 0.305: U$2.JP1.1 39.54,64.85 39.15,64.85 37.36,63.06 37.36,62.89 JP1.5
S1
  Top 0.279: R10.1 29.45,8.47 32.56,11.58 32.56,26.52 42.05,36.01 IC2.25
S2
  Top 0.279: R22.1 27.61,12.08 31.75,16.22 31.75,26.88 34.48,29.61 34.48,35.74 35.25,36.51 IC2.23
S3
  Top 0.279: R34.1 30.94,18.81 30.94,27.25 33.66,29.98 33.66,36.12 35.05,37.51 IC2.21
S4
  Top 0.279: R28.1 27.43,20.26 30.12,22.95 30.12,27.6 32.85,30.33 32.85,36.47 34.88,38.51 IC2.19
S5
  Top 0.279: R40.1 29.26,24.58 29.26,27.97 32.01,30.72 32.01,36.8 34.72,39.51 IC2.17
S6
  Top 0.279: R46.1 27.46,26.34 27.46,27.35 31.18,31.06 31.18,37.13 34.55,40.51 IC2.15
S7
  Top 0.279: R52.1 27.43,29.86 28.09,29.86 30.36,32.13 30.36,37.5 34.37,41.51 IC2.13
S8
  Top 0.279: R68.1 29.55,35.53 29.55,37.87 34.19,42.51 IC2.11
S9
  Top 0.279: R74.1 27.46,37 28.15,37 28.74,37.59 28.74,38.23 34.01,43.51 IC2.9
S10
  Top 0.279: R80.1 27.53,40.53 31.5,44.51 IC2.7
S11
  Top 0.279: R87.1 28.06,44.08 29.48,45.51 IC2.5
S12
  Top 0.279: R93.1 27.43,47.7 33.5,47.7 34.7,46.51 IC2.3
SCK
  Top 0.279: 45.39,52.74 45.39,45.4 44.49,44.51 IC2.42
  Top 0.305: T1.1 38.34,76.39 R59.1 37.05,75.8 36.98,75.8 36.81,75.63 36.81,68.24 41.4,63.65 41.59,63.65 42.29,62.95 42.29,62.89 JP1.2 43.64,60.45 45.39,58.7 45.39,52.74
SCKESP
  Top 0.305: U$2.JP1.4 45.16,78.09 R55.1 41.29,78.09 T1.2
V+
  Top 0.2: 33.85,49.12 R9.1
  Top 0.279: 36.19,47.51 IC2.1
  Top 0.406: 34.62,49.07 36.19,47.51
  Top 0.508: 34.62,49.07 R9.1 33.75,49.26 32.86,50.15 C20.2
VREF1
  Top 0.279: C1.1 45.35,41.01 IC2.35
VREF2  (via drill 0.35)
  Top 0.279: 42.18,40.53 42.16,40.51 IC2.34 44.41,40.51 C4.1
  Top 0.508: 42.18,40.53 42.15,40.53 v41.91,40.28 | JP7.20_THERMO2_IN JP7.19_THERMO1_IN
  Bottom 0.508: JP7.20_THERMO2_IN 2.39,15.29 1.02,13.92 1.02,12.74 1.83,11.94 3.63,11.94 11.37,4.2 24.45,4.2 35.94,15.7 35.94,34.31 v41.91,40.28
VTEMP1  (via drill 0.3, 0.35)
  Top 0.279: R57.2 v22.1,6.01 | v34.72,23.39 35.29,23.39 45.09,33.2 45.09,36.71 44.79,37.01 IC2.27
  Bottom 0.254: v34.72,23.39 34.68,23.36 34.68,17.08
  Bottom 0.279: JP7.21_THERMO1_OUT 4.94,11.96 10.88,6.01 v22.1,6.01 23.57,6.01 34.68,17.08
VTEMP2  (via drill 0.3, 0.35)
  Top 0.279: R58.2 24.28,4.76 v24.28,5.95 | v35.26,22.86 35.36,22.86 45.54,33.05 45.54,37.06 45.09,37.51 IC2.28
  Bottom 0.279: JP7.22_THERMO2_OUT 3.01,13.31 10.92,5.39 23.73,5.39 v24.28,5.95 v24.28,5.96 35.26,16.94 v35.26,22.86

## Text on the board
tNames: 5V | GND | CS | Reset | DC | SDA | SCK | LED | EasyBMS / MEB / v1.8 / 04.05.2023 | V+